# EAGLE board harp load cells interface v1.1 (EAGLE 6.5.0)
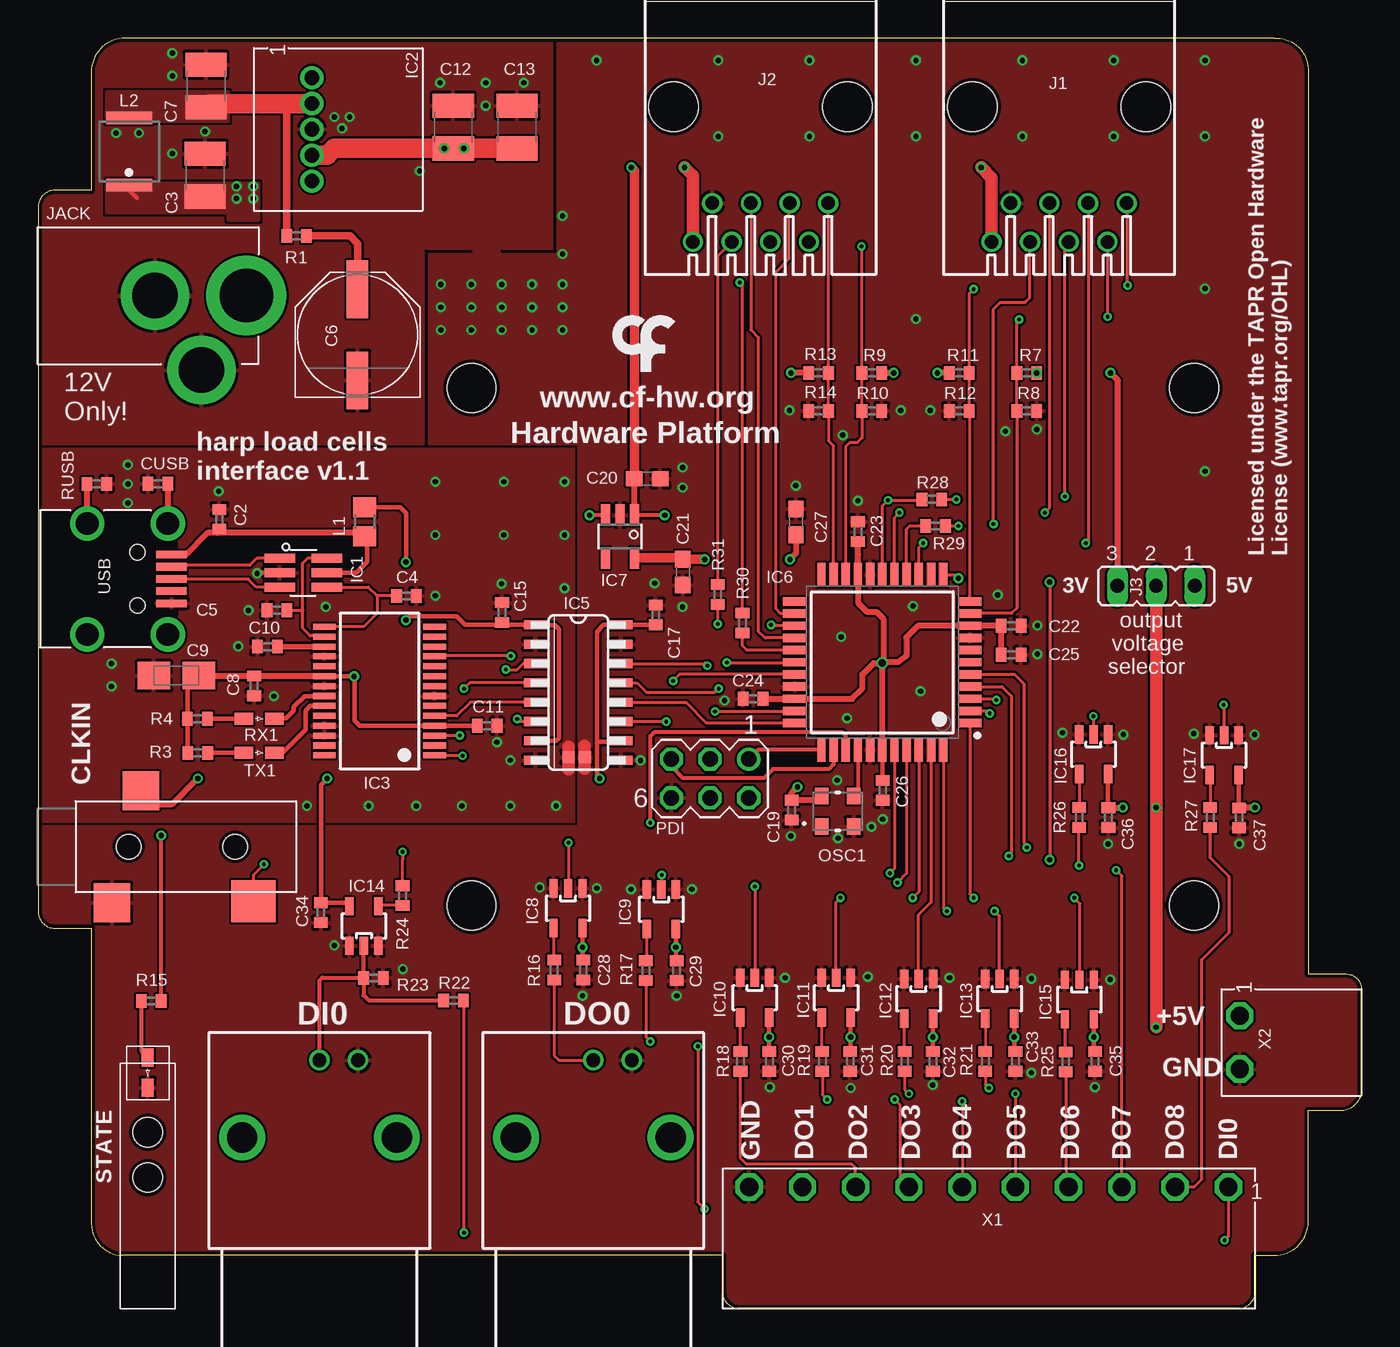
[diagram p0: board, top side]
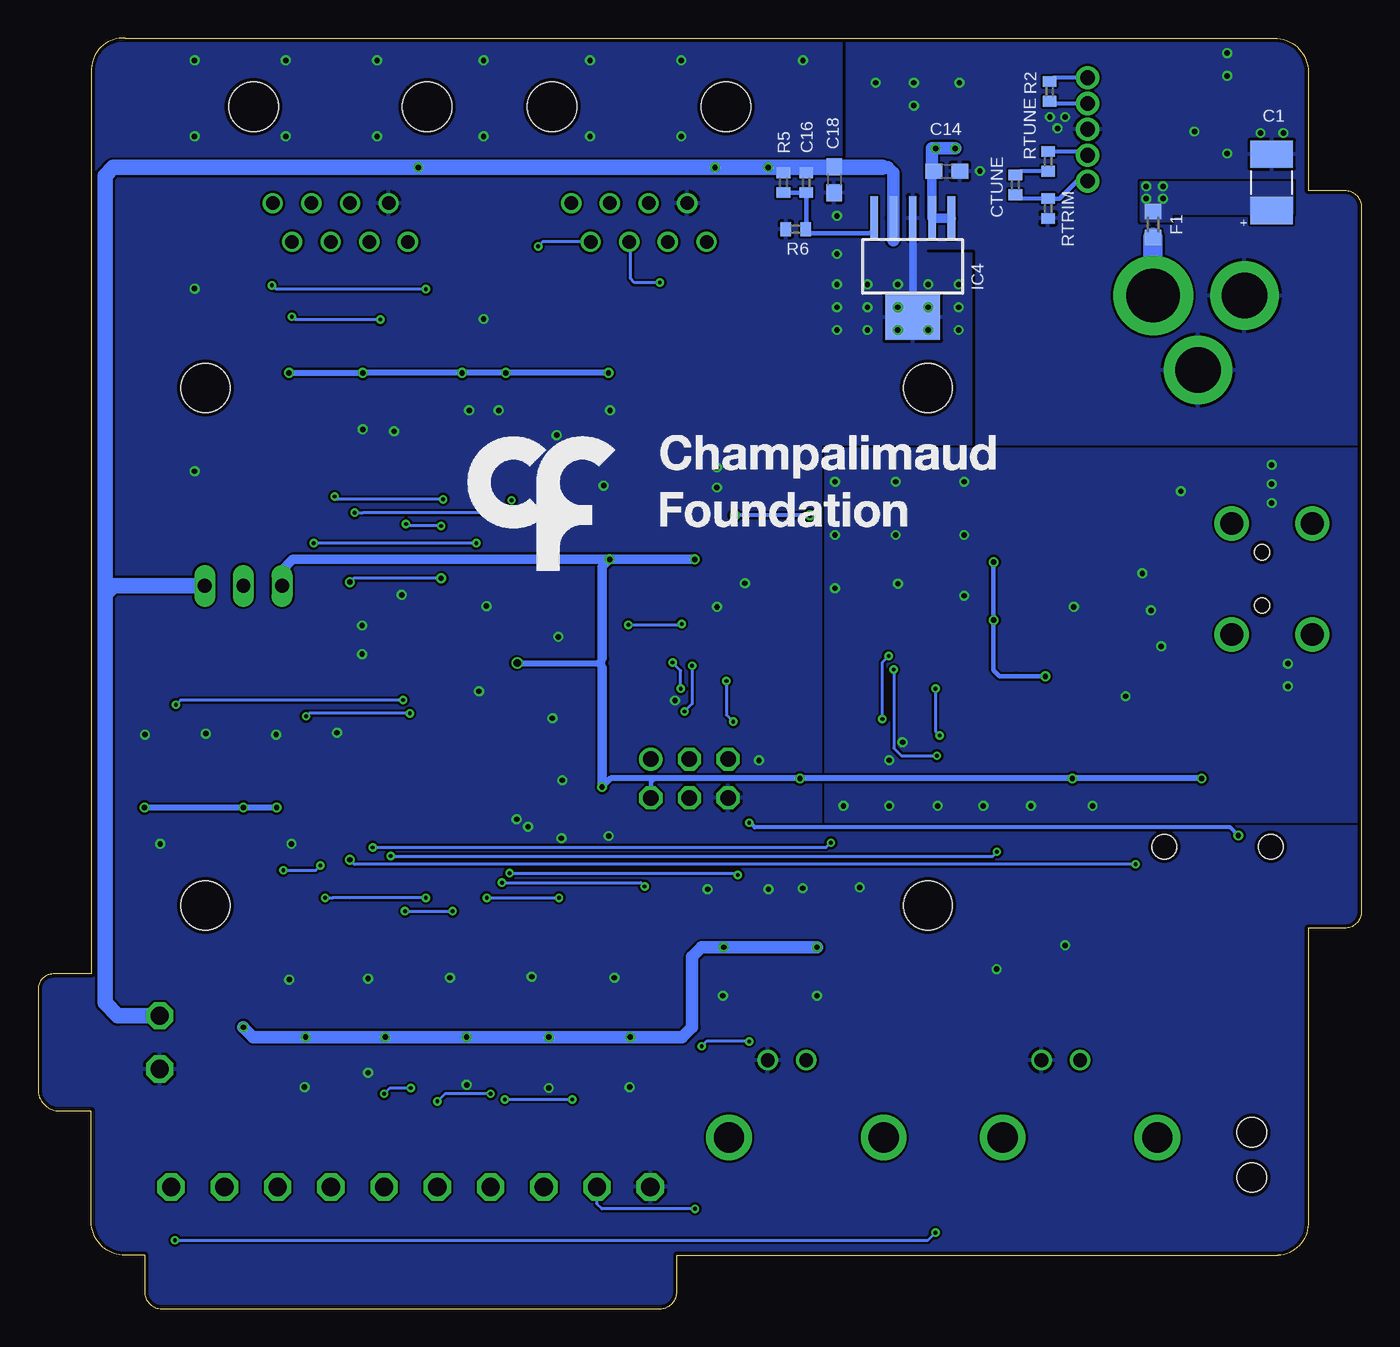
[diagram p1: board, bottom side, seen from below]

Size 87 x 83.5 mm. Coordinates in mm from the lower left corner, seen from the top.
Outline: 3.5,81.26 3.5,73.5 1.12,73.5 arc90 0,72.38 0,26.12 arc90 1.12,25 3.5,25 3.5,5.74 arc90 5.5,3.5 45,3.5 45,1.12 arc90 46.12,0 78.88,0 arc90 80,1.12 80,3.5 81.26,3.5 arc90 83.5,5.74 83.5,13 85.59,13 arc90 87,14.41 87,21 arc90 86,22 83.5,22 83.5,81.5 arc90 81.26,83.5 5.74,83.5 arc90 3.5,81.26
Copper layers (1*16): Top 0.018mm / dielectric 1.55mm / Bottom 0.018mm
Design rules "eC_2Layer_PClass6_BaseCopperO18_eCDefault *": minimum track width 0.15mm, minimum drill 0.15mm, track to track 0.15mm, track to pad 0.15mm, pad to pad 0.15mm, via to via 0.15mm, smd to smd 0mil, copper to edge 0.25mm, drill to drill 0.35mm, minimum pad ring 0.125mm, minimum via ring 0.125mm, stop-mask expansion 0mil, vias tented up to drill 0.45mm, thermal gap 0.2mm
Holes 3.2 mm at 28.5,60.5 28.5,26.5 76,60.5 76,26.5
tRestrict: 4 lines
bRestrict: 3 lines

## Footprints (pad centres in the part's own frame; a part is rotated, then mirrored left to right if it is on the bottom)
CAP_100UF_HAND = smd 1.8 x 2.8: + -1.85,0; - 1.85,0
C0402 = smd 0.7 x 0.9: 1 -0.65,0; 2 0.65,0
C1210 = smd 1.6 x 2.7: 1 -1.4,0; 2 1.4,0
PANASONIC_E = smd 3.8 x 1.4: + 3,0; - -3,0
A/3216-18W = smd 2.15 x 1.8: + 1.475,0; - -1.475,0
C0603 = smd 1.1 x 1: 1 -0.85,0; 2 0.85,0
35RASMT2BHNTRX = smd 2.4 x 2.55: 1 0.8,3.675; 5 -1.1,-3.675 | smd 2.9 x 2.75: 4 8.2,-3.575 | hole 1.6: 0,0; 7,0
R0603 = smd 1 x 1.1: 1 -0.85,0; 2 0.85,0
SOT23-6L = smd 0.6 x 2: P$1 -0.95,-1.55; P$2 0,-1.55; P$3 0.95,-1.55; P$4 0.95,1.55; P$5 0,1.55; P$6 -0.95,1.55
SIP-5 = drill 0.97 pad 1.52: P1 -3.4,0; P2 -1.7,0; P3 0,0; P4 1.7,0; P5 3.4,0
SSOP28 = smd 0.4 x 1.5: 1 -4.225,-3.625; 2 -3.575,-3.625; 3 -2.925,-3.625; 4 -2.275,-3.625; 5 -1.625,-3.625; 6 -0.975,-3.625; 7 -0.325,-3.625; 8 0.325,-3.625; 9 0.975,-3.625; 10 1.625,-3.625; 11 2.275,-3.625; 12 2.925,-3.625; 13 3.575,-3.625; 14 4.225,-3.625; 15 4.225,3.625; 16 3.575,3.625; 17 2.925,3.625; 18 2.275,3.625; 19 1.625,3.625; 20 0.975,3.625; 21 0.325,3.625; 22 -0.325,3.625; 23 -0.975,3.625; 24 -1.625,3.625; 25 -2.275,3.625; 26 -2.925,3.625; 27 -3.575,3.625; 28 -4.225,3.625
SOT223-6 = smd 0.508 x 2.87: P$1 -2.54,-3.175; P$2 -1.27,-3.175; P$3 0,-3.175; P$4 1.27,-3.175; P$5 2.54,-3.175 | smd 3.6 x 2.962: P$6 0,3.353
NSOIC-16 = smd 0.6 x 1.55: 1 -4.437,-2.789; 2 -3.167,-2.789; 3 -1.897,-2.789; 4 -0.627,-2.789; 5 0.643,-2.789; 6 1.913,-2.789; 7 3.183,-2.789; 8 4.453,-2.789; 9 4.453,2.811; 10 3.183,2.811; 11 1.913,2.811; 12 0.643,2.811; 13 -0.627,2.811; 14 -1.897,2.811; 15 -3.167,2.811; 16 -4.437,2.811
QFP80P1200X1200X120-44N = smd 1.55 x 0.55: 1 -5.75,4; 2 -5.75,3.2; 3 -5.75,2.4; 4 -5.75,1.6; 5 -5.75,0.8; 6 -5.75,0; 7 -5.75,-0.8; 8 -5.75,-1.6; 9 -5.75,-2.4; 10 -5.75,-3.2; 11 -5.75,-4; 23 5.75,-4; 24 5.75,-3.2; 25 5.75,-2.4; 26 5.75,-1.6; 27 5.75,-0.8; 28 5.75,0; 29 5.75,0.8; 30 5.75,1.6; 31 5.75,2.4; 32 5.75,3.2; 33 5.75,4 | smd 0.55 x 1.55: 12 -4,-5.75; 13 -3.2,-5.75; 14 -2.4,-5.75; 15 -1.6,-5.75; 16 -0.8,-5.75; 17 0,-5.75; 18 0.8,-5.75; 19 1.6,-5.75; 20 2.4,-5.75; 21 3.2,-5.75; 22 4,-5.75; 34 4,5.75; 35 3.2,5.75; 36 2.4,5.75; 37 1.6,5.75; 38 0.8,5.75; 39 0,5.75; 40 -0.8,5.75; 41 -1.6,5.75; 42 -2.4,5.75; 43 -3.2,5.75; 44 -4,5.75
TSOT23-5 = smd 0.6 x 1.408: 1 -0.95,-1.404; 2 0,-1.404; 3 0.95,-1.404; 4 0.95,1.404; 5 -0.95,1.404
SOT23-5 = smd 0.55 x 1.2: 1 -0.95,-1.3; 2 0,-1.3; 3 0.95,-1.3; 4 0.95,1.3; 5 -0.95,1.3
BNC_RA = drill 0.9 pad 1.27: 1 0,-5.08; 2 -2.54,-5.08 | drill 2: P$1 -5.08,0; P$2 5.08,0
520426-4 = drill 0.889: 1 -4.445,6.35; 2 -3.175,8.89; 3 -1.905,6.35; 4 -0.635,8.89; 5 0.635,6.35; 6 1.905,8.89; 7 3.175,6.35; 8 4.445,8.89 | hole 3.251: -5.715,0; 5.715,0
JP2 = drill 0.914 long: 1 -2.54,0; 2 0,0; 3 2.54,0
DC_POWER_INPUT_2.1MM = drill 3.5: P1 8.5,0 | drill 3: P2 2.5,0; P3 5.55,-4.9
R0805 = smd 1.3 x 1.5: 1 -0.95,0; 2 0.95,0
IND_LPS4012 = smd 0.81 x 3.04: 1 -2.2,0; 2 2.2,0
OSCILLATOR_3.2X2.5 = smd 0.9 x 1.1: P$1 -1.05,-1; P$2 1.05,-1; P$3 1.05,1; P$4 -1.05,1
MA03-2 = drill 1.016: 1 -2.54,-1.27 | drill 1.016 octagon: 2 -2.54,1.27; 3 0,-1.27; 4 0,1.27; 5 2.54,-1.27; 6 2.54,1.27
R0402 = smd 0.7 x 0.9: 1 -0.65,0; 2 0.65,0
LED_HAND = smd 1.2 x 0.8: A -1,0; K 1,0
TP08SQ = smd 0.8 x 0.8: TP 0,0
LED_PIPE_7513D2-L = hole 1.93: -1.486,0; 1.486,0
240-0002-1 = smd 0.5 x 2: P$1 -1.6,8.65; P$2 -0.8,8.65; P$3 0,8.65; P$4 0.8,8.65; P$5 1.6,8.65 | drill 1.5: SHIELD_1 -3.65,3.1; SHIELD_2 3.65,3.1; SHIELD_3 3.65,8.4; SHIELD_4 -3.65,8.4 | hole 1: -1.75,6.4; 1.75,6.4
CON_3.5MM_1X10 = drill 1.2 octagon: P1 -15.75,0; P2 -12.25,0; P3 -8.75,0; P4 -5.25,0; P5 -1.75,0; P6 1.75,0; P7 5.25,0; P8 8.75,0; P9 12.25,0; P10 15.75,0
CON_3.5MM_1X2 = drill 1.2 octagon: P1 -1.75,0; P2 1.75,0

## Placement (x,y rotation side)
C1  22uF  [CAP_100UF_HAND]  5.9,74.02 90 bottom
C2  100nF  [C0402]  11.92,51.88 90 top
C3  22uF  [C1210]  11,74.5 90 top
C4  47pF  [C0402]  24.22,46.84 0 top
C5  47pF  [C0402]  15.71,45.9 180 top
C6  100uF  [PANASONIC_E]  21,64 90 top
C7  22uF  [C1210]  11.05,80.35 90 top
C8  100nF  [C0402]  14.21,40.93 270 top
C9  4.7uF  [A/3216-18W]  9.09,41.61 0 top
C10  100nF  [C0402]  15.08,43.51 180 top
C11  100nF  [C0402]  29.53,38.3 0 top
C12  47uF  [C1210]  27.3,77.65 90 top
C13  47uF  [C1210]  31.5,77.65 90 top
C14  10uF  [C0603]  27.25,74.75 0 bottom
C15  100nF  [C0402]  30.5,45.75 90 top
C16  13pF  [C0402]  36.5,74 270 bottom
C17  100nF  [C0402]  40.61,45.59 90 top
C18  10uF  [C0603]  34.66,74.19 270 bottom
C19  100nF  [C0402]  49.54,32.76 270 top
C20  10uF  [C0603]  40.05,54.54 0 top
C21  10uF  [C0603]  42.39,48.41 270 top
C22  100nF  [C0402]  63.97,44.88 0 top
C23  100nF  [C0402]  53.9,51.07 90 top
C24  100nF  [C0402]  47.01,40.08 180 top
C25  330nF  [C0402]  63.97,42.97 0 top
C26  330nF  [C0402]  55.53,34.06 270 top
C27  10uF  [C0603]  49.82,51.7 90 top
C28  100nF  [C0402]  35.85,22.26 270 top
C29  100nF  [C0402]  41.98,22.21 270 top
C30  100nF  [C0402]  48.08,16.25 270 top
C31  100nF  [C0402]  53.39,16.25 270 top
C32  100nF  [C0402]  58.83,16.25 270 top
C33  100nF  [C0402]  64.25,16.25 270 top
C34  100nF  [C0402]  18.6,26.03 270 top
C35  100nF  [C0402]  69.48,16.25 270 top
C36  100nF  [C0402]  70.36,32.27 270 top
C37  100nF  [C0402]  78.95,32.25 270 top
CLKIN  [35RASMT2BHNTRX]  5.96,30.36 0 top
CTUNE  NA  [C0402]  22.75,73.85 270 bottom
CUSB  4.7nF  [C0402]  7.88,54.22 180 top
F1  1A FB  [R0603]  13.7,71.25 270 bottom
IC1  USBLC6-2SC6  [SOT23-6L]  17.44,48.36 270 top
IC2  DC-DC-SIP-5  [SIP-5]  18,77.5 270 top
IC3  FT232RL  [SSOP28]  22.45,40.59 90 top
IC4  TPS78630DCQ  [SOT223-6]  29.5,68.5 180 bottom
IC5  SI8642BC-B-IS1  [NSOIC-16]  35.5,40.5 270 top
IC6  ATXMEGA128A4U-AU  [QFP80P1200X1200X120-44N]  55.5,42.48 180 top
IC7  LP5907MFX-3.3  [TSOT23-5]  38.27,50.74 180 top
IC8  SN74LVC1G125  [SOT23-5]  34.84,26.32 180 top
IC9  SN74LVC1G125  [SOT23-5]  40.98,26.25 180 top
IC10  SN74LVC1G125  [SOT23-5]  47.11,20.44 180 top
IC11  SN74LVC1G125  [SOT23-5]  52.46,20.44 180 top
IC12  SN74LVC1G125  [SOT23-5]  57.88,20.38 180 top
IC13  SN74LVC1G125  [SOT23-5]  63.22,20.38 180 top
IC14  SN74LVC1G125  [SOT23-5]  21.42,25.15 0 top
IC15  SN74LVC1G125  [SOT23-5]  68.45,20.32 180 top
IC16  SN74LVC1G125  [SOT23-5]  69.38,36.44 180 top
IC17  SN74LVC1G125  [SOT23-5]  77.97,36.38 180 top
IN0  BNC  [BNC_RA]  18.5,11.25 180 top
J1  Port 0  [520426-4]  67.12,79 180 top
J2  Port 0  [520426-4]  47.5,79 180 top
J3  [JP2]  73.5,47.5 180 top
JACK  DC_JACK2.1MM  [DC_POWER_INPUT_2.1MM]  5.19,66.58 0 top
L1  ???  [R0805]  21.48,51.72 270 top
L2  1.5u  [IND_LPS4012]  6,76.05 90 top
OSC1  [OSCILLATOR_3.2X2.5]  52.57,32.69 0 top
OUT0  BNC  [BNC_RA]  36.5,11.25 180 top
PDI  [MA03-2]  44.18,34.84 180 top
R1  0  [R0402]  17,70.5 180 top
R2  NA  [R0402]  20.5,80 270 bottom
R3  2050 NA  [R0402]  10.5,36.53 180 top
R4  680 NA  [R0402]  10.48,38.77 180 top
R5  95.3k  [R0402]  38,74 90 bottom
R6  30.9k  [R0402]  37.19,70.94 0 bottom
R7  NA  [R0402]  65,61.5 0 top
R8  100k  [R0402]  65,59 180 top
R9  NA  [R0402]  54.81,61.5 0 top
R10  100k  [R0402]  54.81,59 180 top
R11  NA  [R0402]  60.56,61.5 180 top
R12  100k  [R0402]  60.56,59 0 top
R13  NA  [R0402]  51.31,61.5 180 top
R14  100k  [R0402]  51.31,59 0 top
R15  68  [R0402]  7.44,20.22 0 top
R16  33  [R0402]  33.93,22.26 270 top
R17  33  [R0402]  39.96,22.21 270 top
R18  33  [R0402]  46.18,16.25 270 top
R19  33  [R0402]  51.56,16.25 270 top
R20  33  [R0402]  56.97,16.25 270 top
R21  33  [R0402]  62.27,16.25 270 top
R22  330  [R0402]  27.31,20.25 180 top
R23  100k  [R0402]  22.05,21.73 180 top
R24  33  [R0402]  23.97,27.15 90 top
R25  33  [R0402]  67.56,16.22 270 top
R26  33  [R0402]  68.44,32.28 270 top
R27  33  [R0402]  77.06,32.28 270 top
R28  33  [R0402]  58.75,53.19 0 top
R29  33  [R0402]  59,51.44 0 top
R30  33  [R0402]  46.31,45.06 270 top
R31  33  [R0402]  44.69,46.94 270 top
RTRIM  243  [R0402]  20.6,72.3 90 bottom
RTUNE  NA  [R0402]  20.6,75.4 90 bottom
RUSB  1M  [R0402]  3.87,54.2 0 top
RX1  GREEN NA  [LED_HAND]  14.53,38.77 0 top
STATE  GREEN  [LED_HAND]  7.21,15.51 270 top
TP1  TPTP08SQ  [TP08SQ]  34.88,36.25 0 top
TP2  TPTP08SQ  [TP08SQ]  35.94,36.25 0 top
TX1  RED NA  [LED_HAND]  14.53,36.53 0 top
U$1  [LED_PIPE_7513D2-L]  7.21,10.11 90 top
U$2  [LOGO_5]  55.68,54.22 0 bottom
U$4  [LOGO_7]  39,64 0 top
USB  [240-0002-1]  0.13,47.96 270 top
X1  CON_3.5MM_1X10  [CON_3.5MM_1X10]  62.5,8 180 top
X2  CON_3.5MM_1X2  [CON_3.5MM_1X2]  79,17.5 270 top

## Library data of the parts
C1 JACK L2 OSC1 RX1 STATE TX1 U$1 U$2 U$4 = CNP-miscellaneous
C2-C37 CTUNE CUSB F1 L1 R1-R31 RTRIM RTUNE RUSB = rcl
CLKIN IC2 IN0 OUT0 USB X1 X2 = CNP-connectors
IC1 = CNP 2
IC3 = ftdichip; MPN: FT232RL; OC_FARNELL: 1146032; OC_NEWARK: 91K9918
IC4 IC7 = CNP
IC5 = CNP-ics 2
IC6 = xmega-a4
IC8-IC17 = My_library 0v2
J1 J2 = con-amp
J3 = jumper
PDI = con-lstb; OC_FARNELL: unknown; OC_NEWARK: unknown
TP1 TP2 = testpad

## Nets
3V3OUT: C10.1 IC3.17
!CS0_0: IC6.14 J1.3
!CS0_1: IC6.10 J1.2 R7.1 R8.2
!CS0_2: IC6.11 J1.1 R11.1 R12.2
!CS1_0: IC6.24 J2.3
!CS1_1: IC6.20 J2.2 R9.1 R10.2
!CS1_2: IC6.21 J2.1 R13.1 R14.2
+5V: C16.1 C18.1 C20.1 IC4.P$4 IC7.1 IC7.3 J1.8 J2.8 J3.1 R5.2 X2.P1
+12V: C1.+ C3.1 F1.1 L2.1
+V: C28.1 C29.1 C30.1 C31.1 C32.1 C33.1 C35.1 C36.1 C37.1 IC8.5 IC9.5 IC10.5 IC11.5 IC12.5 IC13.5 IC15.5 IC16.5 IC17.5 J3.2
BNC_DI0: IC14.2 IN0.1 R22.2 R23.2
CLK_SYNC: CLKIN.4 IC6.12
CTS: IC5.11 IC6.29
DCIN: C7.1 IC2.P2 L2.2 R1.2 R2.2
DI0: R22.1 X1.P1
DO0: OUT0.1 R16.2
DO1: R17.2 X1.P9
DO2: R18.2 X1.P8
DO3: R19.2 X1.P7
DO4: R20.2 X1.P6
DO5: R21.2 X1.P5
DO6: R25.2 X1.P4
DO7: R26.2 X1.P3
DO8: R27.2 X1.P2
FT_CTS: IC3.11 IC5.6
FT_RTS: IC3.3 IC5.4
FT_RXD: IC3.5 IC5.5
FT_TXD: IC3.1 IC5.3
GND: C1.- C3.2 C6.- C7.2 C12.2 C13.2 C14.2 C17.2 C18.2 C19.2 C20.2 C21.2 C22.2 C23.2 C24.2 C25.2 C26.2 C27.2 C28.2 C29.2 C30.2 C31.2 C32.2 C33.2 C34.2 C35.2 C36.2 C37.2 CLKIN.5 IC2.P3 IC4.P$3 IC4.P$6 IC5.9 IC5.15 IC6.8 IC6.18 IC6.30 IC6.38 IC7.2 IC8.1 IC8.3 IC9.1 IC9.3 IC10.1 IC10.3 IC11.1 IC11.3 IC12.1 IC12.3 IC13.1 IC13.3 IC14.1 IC14.3 IC15.1 IC15.3 IC16.1 IC16.3 IC17.1 IC17.3 IN0.2 J1.7 J2.7 JACK.P2 JACK.P3 OSC1.P$2 OUT0.2 PDI.6 R6.1 R8.1 R10.1 R12.1 R14.1 R23.1 RTRIM.1 STATE.K TP2.TP X1.P10 X2.P2
GND2: C2.2 C4.2 C5.2 C8.2 C9.- C10.2 C11.2 C15.2 CUSB.2 IC1.P$2 IC3.7 IC3.18 IC3.21 IC3.25 IC3.26 IC5.2 IC5.8 RUSB.2 TP1.TP USB.P$5
IN00: IC6.4 R24.2
MISO0: IC6.16 J1.5
MISO1: IC6.26 J2.5
MOSI0: IC6.15 R29.1
MOSI0_T: J1.6 R29.2
MOSI1: IC6.25 R31.2
MOSI1_T: J2.6 R31.1
N$1: IC16.4 R26.1
N$2: IC15.4 R25.1
N$4: IC10.4 R18.1
N$5: R4.1 RX1.A
N$6: IC17.4 R27.1
N$7: IC3.22 RX1.K
N$8: IC9.4 R17.1
N$9: IC12.4 R20.1
N$11: IC8.4 R16.1
N$12: CTUNE.2 IC2.P5 RTRIM.2
N$13: IC1.P$3 USB.P$3
N$14: CTUNE.1 RTUNE.1
N$15: CUSB.1 USB.SHIELD_4
N$16: IC2.P1 R2.1
N$17: IC13.4 R21.1
N$18: F1.2 JACK.P1
N$19: IC11.4 R19.1
N$20: C16.2 IC4.P$5 R5.1 R6.2
N$21: IC14.4 R24.1
N$23: R15.1 STATE.A
N$24: C6.+ R1.1
N$60: C2.1 IC1.P$5 L1.2 USB.P$1
N$401: R3.1 TX1.A
N$591: IC3.23 TX1.K
N$601: RUSB.1 USB.SHIELD_1
N$701: IC1.P$1 USB.P$2
OSC1: IC6.37 OSC1.P$3
OUT00: IC6.5 IC8.2
OUT01: IC6.40 IC9.2
OUT02: IC6.41 IC10.2
OUT03: IC6.42 IC11.2
OUT04: IC6.43 IC12.2
OUT05: IC6.44 IC13.2
OUT06: IC6.1 IC15.2
OUT07: IC6.2 IC16.2
OUT08: IC6.3 IC17.2
P5.45V: C12.1 C13.1 C14.1 IC2.P4 IC4.P$1 IC4.P$2 RTUNE.2
PDI-CLK: IC6.35 PDI.5
PDI-DATA: IC6.34 PDI.1
RTS: IC5.13 IC6.28
RXD: IC5.12 IC6.33
SCK0: IC6.17 R28.1
SCK0_T: J1.4 R28.2
SCK1: IC6.27 R30.2
SCK1_T: J2.4 R30.1
STATE: IC6.36 R15.2
TXD: IC5.14 IC6.32
USB5V: C8.1 C9.+ C11.1 C15.1 IC3.4 IC3.20 IC5.1 IC5.7 L1.1 R3.2 R4.2
USBDM: C5.1 IC1.P$6 IC3.16
USBDP: C4.1 IC1.P$4 IC3.15
VCCIO: C17.1 C19.1 C21.1 C22.1 C23.1 C24.1 C25.1 C26.1 C27.1 C34.1 CLKIN.1 IC5.10 IC5.16 IC6.9 IC6.19 IC6.31 IC6.39 IC7.5 IC14.5 J3.3 OSC1.P$4 PDI.2 R7.2 R9.2 R11.2 R13.2

## Tracks (layer width: path | path; a pad name or v marks a point on that pad's centre or on a via)
3V3OUT
  Top 0.305: 16.04,43.51 C10.1
  Top 0.356: IC3.17 16.04,43.51
!CS0_0  (via drill 0.25 pad 0.55)
  Top 0.203: IC6.14 57.9,50.03 v58.19,50.31 | J1.3 69.03,50.47 v68.88,50.31
  Bottom 0.203: v58.19,50.31 v68.88,50.31
!CS0_1  (via drill 0.25 pad 0.55)
  Top 0.203: IC6.10 64,45.69 64.35,46.04 R8.2 R7.1 64.35,64.85 v64.5,65 | v70.31,65.19 70.31,70.1 J1.2
  Bottom 0.203: v64.5,65 70.12,65 v70.31,65.19
!CS0_2  (via drill 0.25 pad 0.55)
  Top 0.203: IC6.11 61.25,58.84 R12.2 R11.1 61.21,66.71 v61.5,67 | v71.62,67.25 71.62,72.59 J1.1
  Bottom 0.203: v61.5,67 71.38,67 v71.62,67.25
!CS1_0
  Top 0.203: IC6.24 48.82,45.68 48.5,46 48.5,68.12 49.38,69 49.38,72.62 J2.3
!CS1_1  (via drill 0.25 pad 0.55)
  Top 0.203: IC6.20 53.1,56.66 53.38,56.94 53.88,56.94 54.16,57.23 R10.2 R9.1 54.12,61.54 v54.12,69.81
  Bottom 0.203: J2.2 53.83,70.11 v54.12,69.81
!CS1_2
  Top 0.203: IC6.21 52.3,56.7 52,57 52,58.96 R14.2 R13.1 51.96,72.63 J2.1
+5V  (via drill 0.35 pad 0.65)
  Top 0.254: IC7.3 v36.27,52.15 v36.26,52.14 | v41.2,52.14 IC7.1
  Top 0.305: IC7.1
  Top 0.406: IC7.1 39.22,54.53 C20.1 39.21,54.55
  Top 0.508: 39.2,52.16 IC7.1
  Top 0.61: 39.21,54.55 39.21,74.79 v39,75
  Top 0.813: J2.8 43.05,74.44 v42.5,75 | J1.8 62.68,74.32 v62,75
  Bottom 0.254: C16.1 R5.2 | v36.26,52.14 v41.2,52.14
  Bottom 0.305: C18.1 33.54,75.04 33.5,75 | C16.1 36.65,74.65 37,75
  Bottom 0.813: 30.77,70.23 IC4.P$4 30.77,74.64 31.12,75 31.5,75
  Bottom 1.016: X2.P1 81.75,19.25 82.6,20.1 82.6,47 | 82.6,47 82.6,74.46 82.06,75 v62,75 v42.5,75 v39,75 37,75 33.5,75 31.5,75 | J3.1 82,47.5 82.6,47
+12V  (via drill 0.35 pad 0.65)
  Top 0.254: L2.1 6,73.5 6.5,73
  Bottom 0.254: C1.+ 5.9,72.1 6,72
  other vias: 14.15,73.75 13.05,73.75 14.15,72.95 13.05,72.95
  pour Top (no thermals): 4.5,74 14.5,74 14.5,71.5 12.5,71.5 12.5,72 4.5,72
  pour Bottom (no thermals): 4.5,74 14.5,74 14.5,71.5 12.5,71.5 12.5,72 4.5,72
+V  (via drill 0.35 pad 0.65)
  Top 0.305: 48.11,19.45 IC10.5 v48.06,17.85 48.06,16.92 C30.1 | 58.83,19.36 IC12.5 | 41.93,25.23 IC9.5 41.93,23.68 | 35.79,25.19 IC8.5 v35.79,23.75 35.79,22.96 C28.1 | C35.1 69.4,16.98 IC15.5 v69.4,17.85 | IC13.5 v64.17,17.85 64.17,16.87 C33.1 | IC12.5 C32.1 | C31.1 53.41,16.93 IC11.5 v53.41,17.85 | IC12.5 v58.83,17.85 | C29.1 41.93,22.92 41.93,23.68 | 41.93,23.68 42,23.75 v41.93,23.75 | IC16.5 70.33,32.95 C36.1 | IC17.5 78.92,32.94 C37.1
  Top 0.406: C36.1 70.98,32.92 v71.31,32.94 | 73.48,33.42 73.5,33.44 | v80,32.94 78.99,32.94 C37.1
  Top 0.813: v73.5,18.5 v73.5,32.94 | 73.5,33.44 v73.5,32.94 | v73.5,32.94 J3.2
  Bottom 0.254: v73.5,32.94 73.5,33 73.47,32.97 73.47,32.94
  Bottom 0.406: v71.31,32.94 73.47,32.94 | v73.5,32.94 v80,32.94
  Bottom 0.813: v35.79,23.75 v41.93,23.75 43.38,23.75 44,23.12 44,18.5 44.65,17.85 v48.06,17.85 v53.41,17.85 v58.83,17.85 v64.17,17.85 v69.4,17.85 72.85,17.85 v73.5,18.5
BNC_DI0
  Top 0.254: IN0.1 18.5,21.56 18.69,21.75 21.39,21.75 R23.2 | R23.2 21.4,23.83 IC14.2 | R22.2 21.75,20.25 21.4,20.6 R23.2
CLK_SYNC  (via drill 0.25 pad 0.55, 0.35 pad 0.65)
  Top 0.203: CLKIN.4 14.16,28.52 v14.85,29.2 | IC6.12 60.27,48.23 v60.5,48 | v66.5,47.75 v66.5,29.5
  Bottom 0.203: v14.85,29.2 66.2,29.2 v66.5,29.5 | v60.5,48 66.25,48 v66.5,47.75
CTS  (via drill 0.25 pad 0.55)
  Top 0.203: IC6.29 42.18,41.68 v41.75,41.25 | v41.3,38.58 38.32,38.58
  Top 0.254: 38.32,38.58 IC5.11
  Bottom 0.203: v41.75,41.25 41.75,39.03 v41.3,38.58
DCIN
  Top 0.305: 16.35,79.05 16.5,79.2
  Top 0.508: R1.2 16.35,79.05
  Top 1.27: IC2.P2 16.5,79.2 11.3,79.2 C7.1
  Bottom 0.254: IC2.P2 20.35,79.2 R2.2
  pour Top (no thermals): 12.5,80 12.5,78 4.5,78 4.5,80
DI0  (via drill 0.25 pad 0.55)
  Top 0.203: X1.P1 78.25,4.75 v78,4.5 | v28,5 28,20.21 R22.1
  Bottom 0.203: v78,4.5 28.5,4.5 v28,5
DO0
  Top 0.203: R16.2 33.93,16.63 34.25,16.31 36.48,16.31 OUT0.1
DO1  (via drill 0.25 pad 0.55)
  Top 0.203: R17.2 39.96,17.85 v40.25,17.56 | v43.38,17.25 43.38,7 v43.81,6.56
  Bottom 0.203: v40.25,17.56 43.06,17.56 v43.38,17.25 | v43.81,6.56 49.94,6.56 50.25,6.88 X1.P9
DO2
  Top 0.203: X1.P8 53.75,9.25 53.5,9.5 46.56,9.5 46.19,9.88 R18.2
DO3  (via drill 0.25 pad 0.55)
  Top 0.203: R19.2 51.56,14.07 v51.88,13.75 | X1.P7 56.88,8 56.69,8.19 56.69,13.38 v56.31,13.75
  Bottom 0.203: v56.31,13.75 v51.88,13.75
DO4  (via drill 0.25 pad 0.55)
  Top 0.203: R20.2 56.97,14.4 v57.25,14.12 | v60.75,13.62 X1.P6
  Bottom 0.203: v57.25,14.12 60.25,14.12 v60.75,13.62
DO5  (via drill 0.25 pad 0.55)
  Top 0.203: R21.2 62.27,14.73 v62.5,14.5 | v64.25,14.12 X1.P5
  Bottom 0.203: v62.5,14.5 63.88,14.5 v64.25,14.12
DO6
  Top 0.203: R25.2 67.56,9.19 X1.P4
DO7  (via drill 0.25 pad 0.55)
  Top 0.203: X1.P3 71.25,28.44 v70.88,28.81 | v68.44,29.12 R26.2
  Bottom 0.203: v70.88,28.81 68.75,28.81 v68.44,29.12
DO8
  Top 0.203: R27.2 77.06,29.62 78.31,28.38 78.31,24.75 76.5,22.94 76.5,8.5 76,8 X1.P2
FT_CTS  (via drill 0.25 pad 0.55)
  Top 0.203: IC5.6 31.66,38.59 v31.5,38.75 | v31.08,42.9 26.11,42.9
  Top 0.254: 26.11,42.9 IC3.11
  Top 0.305: 26.09,42.88 IC3.11
  Bottom 0.203: v31.5,38.75 31.5,42.48 v31.08,42.9
FT_RTS  (via drill 0.25 pad 0.55)
  Top 0.203: IC5.4 28.38,41.13 v28,40.75 | v27.73,37.66 IC3.3
  Top 0.254: IC3.3
  Top 0.305: IC3.3
  Bottom 0.203: v28,40.75 28,37.93 v27.73,37.66
FT_RXD
  Top 0.203: IC5.5 28.43,39.86 27.53,38.96 IC3.5
  Top 0.254: IC3.5
  Top 0.305: 26.12,38.93 IC3.5
  Top 0.406: 26.09,38.96 IC3.5
FT_TXD  (via drill 0.25 pad 0.55)
  Top 0.203: v27.91,36.34 26.1,36.34 | v30.75,42 31.5,42 32,42.5 32.61,42.5 IC5.3
  Top 0.254: 26.1,36.34 IC3.1
  Bottom 0.203: v30.75,42 30.75,36.85 30.25,36.34 v27.91,36.34
GND  (via drill 0.35 pad 0.65)
  Top 0.406: IC6.8
  Top 0.813: 35.94,37 35.94,35.5
  Bottom 0.508: 29.5,72 29.5,65.5
  other vias: 5.13,77.26 6.63,77.26 10.98,77.36 8.83,82.51 8.83,81.01 28.48,65.81 30.48,65.81 30.48,64.31 28.48,64.31 32.48,65.81 32.48,64.31 32.48,67.31 30.48,67.31 28.48,67.31 26.48,67.31 26.48,65.81 26.48,64.31 19.48,78.31 20.48,78.31 19.98,77.56 8.83,75.91 25.08,74.76 29.43,79.06 29.43,80.56 26.43,80.56 40.53,47.67 42.36,46.12 58.01,40.58 52.8,44.15 57.52,46.17 53.18,38.8 65.69,44.89 53.9,53.1 49.81,54.09 49.48,31.07 45.13,39.97 54.78,31.67 39.61,36.04 55.53,32.17 52.53,34.73 52.6,30.92 35.8,20.57 41.98,20.57 48.11,14.57 53.42,14.5 58.82,14.71 65.3,15.5 69.48,14.57 42.98,27.57 38.98,27.57 36.73,27.63 32.98,27.69 49.11,21.75 54.55,21.82 59.92,21.75 65.3,21.69 70.48,21.63 70.35,30.54 78.97,30.54 79.97,37.73 71.35,37.73 67.35,37.86 75.97,37.79 23.98,22.32 19.48,23.88 52.9,57.41 49.4,59.04 56.71,59.04 58.65,59.04 65.65,57.79 63.59,57.66 63.09,46.91 34.48,67.31 34.48,69.31 34.48,71.81 34.48,65.81 34.48,64.31 31.93,80.56 65.69,43.02 42.37,55.28 42.37,53.96 44.71,82.04 44.71,77.04 50.71,77.04 50.71,82.04 36.71,82.04 57.71,82.04 57.71,77.04 64.71,77.04 64.71,82.04 70.71,82.04 70.71,77.04 76.71,77.04 76.71,82.04 76.71,67.04 76.71,55.04 57.71,65.04
  pour Bottom (rank 2): 45.11,-0.06 83.5,-0.06 83.5,13 87,13 87,22 83.5,22 83.5,83.5 3.5,83.5 3.5,73.5 0,73.5 0,25 3.5,25 3.5,3.5 45.11,3.5
  pour Top (rank 2): 83.5,-0.06 83.5,13 87,13 87,22 83.5,22 83.5,83.5 3.5,83.5 3.5,73.5 0,73.5 0,25 3.5,25 3.5,3.5 45.11,3.5 45.11,-0.06
GND2  (via drill 0.35 pad 0.65)
  Top 0.305: IC1.P$2 14.44,48.36 v14.4,48.32
  Top 0.813: 34.88,36.94 34.88,35.44
  other vias: 5.9,55.45 5.9,54.2 5.9,52.95 11.87,53.72 13.84,45.89 4.84,42.39 4.84,40.89 13.17,43.52 15.5,40.25 26.12,46.85 18.91,46.12 30.16,37.23 26.12,50.85 26.12,54.35 30.62,54.35 34.62,54.35 34.62,50.85 30.62,50.85 30.47,47.65 34.62,47.35 31.05,36.04 31.05,33.04 34.05,33.04 24.86,33.04 27.86,33.04 17.68,33.04 21.74,33.04
  pour Top: 0,56.5 35.25,56.5 35.25,32 0,32
  pour Bottom: 0,56.5 35.25,56.5 35.25,32 0,32
IN00  (via drill 0.25 pad 0.55)
  Top 0.203: IC6.4 63.37,40.88 64,40.25 64,29.94 v63.81,29.75 | R24.2 23.97,29.5 v23.97,30.03
  Bottom 0.203: v63.81,29.75 24.25,29.75 v23.97,30.03
MISO0  (via drill 0.25 pad 0.55)
  Top 0.203: IC6.16 56.3,51.99 v56.62,52.31 | J1.5 66.49,52.62 v66.19,52.31
  Bottom 0.203: v56.62,52.31 65,52.31 65.62,52.31 v66.19,52.31
MISO1
  Top 0.203: IC6.26 47.79,44.08 47.38,44.5 47.38,63.81 46.87,64.32 J2.5
MOSI0
  Top 0.203: IC6.15 57.1,51.23 57.31,51.44 R29.1
MOSI0_T  (via drill 0.25 pad 0.55)
  Top 0.203: J1.6 65.19,70.08 65.19,66.44 64.88,66.12 63.25,66.12 62.81,65.69 v62.81,51.56 | R29.2 v60.5,51.44
  Bottom 0.203: v60.5,51.44 62.69,51.44 v62.81,51.56
MOSI1  (via drill 0.25 pad 0.55)
  Top 0.203: IC6.25 48.24,44.88 v48.19,44.94 | v44.69,45 R31.2
  Bottom 0.203: v48.19,44.94 44.75,44.94 v44.69,45
MOSI1_T
  Top 0.203: R31.1 44.69,69.2 J2.6
N$1
  Top 0.203: IC16.4 68.44,35.14 R26.1
  Top 0.305: 68.43,33.11 R26.1
N$2
  Top 0.203: IC15.4 67.5,16.93
  Top 0.305: IC15.4 | 67.5,16.93 R25.1
N$4
  Top 0.203: IC10.4 46.16,17.23 R18.1
N$5
  Top 0.305: RX1.A R4.1
N$6
  Top 0.203: IC17.4 77.06,35.08 R27.1
N$7
  Top 0.305: IC3.22 17.52,40.26 16.82,39.56 16.82,39.31 16.31,38.8 15.55,38.8 RX1.K
N$8
  Top 0.203: 40.01,24.97 40.01,22.92 R17.1
  Top 0.305: 40.01,24.97 IC9.4
N$9
  Top 0.203: IC12.4 56.93,17.14
  Top 0.305: 56.93,17.14 R20.1
N$11
  Top 0.203: IC8.4 33.89,22.99 R16.1
N$12
  Bottom 0.254: RTRIM.2 22.5,72.95 CTUNE.2
  Bottom 0.305: IC2.P5 18.7,74.1 19.85,72.95 RTRIM.2
N$13
  Top 0.203: IC1.P$3 14.35,47.41 13.82,47.94 8.8,47.94
  Top 0.305: 8.81,47.93 USB.P$3 8.8,47.94
N$14
  Bottom 0.254: RTUNE.1 22.38,74.75 CTUNE.1
N$15
  Top 0.305: 8.51,51.63 USB.SHIELD_4
  Top 0.406: CUSB.1 8.51,51.63
N$16
  Bottom 0.254: IC2.P1 20.25,80.9 R2.1
N$17
  Top 0.203: IC13.4 62.27,17.02
  Top 0.305: 62.27,17.02 R21.1
N$18
  Bottom 1.27: F1.2 JACK.P1
N$19
  Top 0.203: IC11.4 51.51,16.72
  Top 0.305: 51.51,16.72 R19.1
N$20
  Bottom 0.305: R5.1 C16.2 36.5,70.97 R6.2 36.27,70.67 32.33,70.67 32,71 32,71.64 IC4.P$5
N$21
  Top 0.203: R24.1 22.42,26.5 IC14.4
N$23
  Top 0.254: R15.1 6.79,16.93 STATE.A
N$24
  Top 0.508: R1.1 20.5,70.5 21,70 C6.+
N$60
  Top 0.305: IC1.P$5 20.92,48.36 21.64,49.09 21.64,50.36 21.01,50.99 21.49,50.99 L1.2 | 9.66,49.49 8.83,49.51 USB.P$1 | C2.1 11.92,51.12
  Top 0.406: 21.01,50.99 11.79,50.99 | 11.79,50.99 11.16,50.99 9.66,49.49 | 11.92,51.12 11.79,50.99
N$401
  Top 0.305: TX1.A R3.1
N$591
  Top 0.305: IC3.23 17.89,39.61 17.58,39.31 17.58,38.04 16.05,36.51 15.54,36.51 TX1.K
N$601
  Top 0.305: 3.22,51.62 USB.SHIELD_1
  Top 0.406: RUSB.1 3.22,51.62
N$701
  Top 0.203: IC1.P$1 14.39,49.31 13.92,48.84 8.87,48.84
  Top 0.305: 8.81,48.78 USB.P$2 8.87,48.84
OSC1
  Top 0.152: 53.9,33.96 OSC1.P$3
  Top 0.254: IC6.37 53.9,33.96
OUT00  (via drill 0.25 pad 0.55)
  Top 0.203: IC6.5 64.19,41.68 64.81,41.06 64.81,30.62 v65,30.31 | v34.88,30.62 34.88,27.65 IC8.2
  Bottom 0.203: v65,30.31 35.19,30.31 v34.88,30.62
OUT01  (via drill 0.25 pad 0.55)
  Top 0.203: IC6.40 56.3,28.93 v56,28.62 | v41,28.5 41,27.57 IC9.2
  Bottom 0.203: v56,28.62 41.12,28.62 v41,28.5
OUT02  (via drill 0.25 pad 0.55)
  Top 0.203: IC6.41 57.1,28.6 v56.5,28 | v47.12,27.75 47.12,21.76 IC10.2
  Bottom 0.203: v56.5,28 47.38,28 v47.12,27.75
OUT03  (via drill 0.25 pad 0.55)
  Top 0.203: IC6.42 57.9,27.4 v57.5,27 | IC11.2 52.46,26.71 v52.75,27
  Bottom 0.203: v57.5,27 v52.75,27
OUT04
  Top 0.203: IC6.43 58.7,26.7 57.88,25.88 IC12.2
OUT05  (via drill 0.25 pad 0.55)
  Top 0.203: IC6.44 59.5,26.37 v59.75,26.12 | 63.2,21.72 63.2,25.8 v62.88,26.12
  Top 0.305: 63.2,21.72 IC13.2
  Bottom 0.203: v62.88,26.12 v59.75,26.12
OUT06  (via drill 0.25 pad 0.55)
  Top 0.203: IC6.1 61.25,27.25 v61.5,27 | IC15.2 68.5,21.66 68.5,26.62 v68.12,27
  Top 0.305: 68.47,21.63 IC15.2
  Bottom 0.203: v61.5,27 66.5,27 67.62,27 v68.12,27
OUT07  (via drill 0.25 pad 0.55)
  Top 0.203: IC6.2 62.41,39.28 v62.56,39.12 | v69.38,38.94 IC16.2
  Bottom 0.203: v62.56,39.12 69.19,39.12 v69.38,38.94
OUT08  (via drill 0.25 pad 0.55)
  Top 0.203: IC6.3 62.92,40.08 v63,40 | v77.94,39.69 77.94,37.72 IC17.2
  Bottom 0.203: v63,40 77.62,40 v77.94,39.69
P5.45V  (via drill 0.35 pad 0.65)
  Top 0.813: C12.1 v26.7,76.25
  Top 1.27: C13.1 v26.7,76.25 v28,76.25 C12.1 19.45,76.25 19,75.8 IC2.P4
  Bottom 0.254: RTUNE.2 18.25,76.05 IC2.P4
  Bottom 0.61: C14.1 28.23,74.88 IC4.P$2 IC4.P$1
  Bottom 0.813: v26.7,76.25 28.25,76.25 | 28.23,74.88 28.23,76.02 v28,76.25
PDI-CLK
  Top 0.254: IC6.35 52.3,35.77 51.99,35.45 48.31,35.45 47.72,34.87 42.41,34.87 41.63,35.65 PDI.5
PDI-DATA
  Top 0.254: IC6.34 47.33,36.73 PDI.1
RTS  (via drill 0.25 pad 0.55)
  Top 0.203: IC5.13 39.37,41.13 40,40.5 44.5,40.5 v44.75,40.75 | v45.28,42.46 49.73,42.46
  Top 0.254: 49.73,42.46 IC6.28
  Bottom 0.203: v44.75,40.75 44.75,41.93 v45.28,42.46
RXD
  Top 0.203: IC6.33 43.96,38.48 42.62,39.82 38.35,39.82
  Top 0.254: 38.35,39.82 IC5.12
SCK0  (via drill 0.25 pad 0.55)
  Top 0.203: IC6.17 55.5,52.75 v55.88,53.12 58.04,53.12 R28.1
SCK0_T  (via drill 0.25 pad 0.55)
  Top 0.203: v67.5,53.38 67.5,69.85 J1.4 | R28.2 v60.38,53.19
  Bottom 0.203: v60.38,53.19 67.31,53.19 v67.5,53.38
SCK1
  Top 0.203: IC6.27 46.59,43.28 46.31,43.56 R30.2
SCK1_T  (via drill 0.25 pad 0.55)
  Top 0.203: R30.1 46.31,67.25 v46.12,67.44
  Bottom 0.203: v46.12,67.44 47.81,67.44 48.06,67.69 48.06,70.04 J2.4
STATE  (via drill 0.25 pad 0.55, 0.35 pad 0.65)
  Top 0.254: R15.2 v8.09,31.09 | 53.1,37.15 IC6.36 53.06,36.77 53.06,37.69 52.88,37.88 40.5,37.88 40.25,37.62 v40.25,31.94
  Bottom 0.254: v8.09,31.09 8.62,31.62 39.88,31.62 40.25,32 v40.25,31.94
TXD  (via drill 0.25 pad 0.55)
  Top 0.203: IC5.14 43.85,42.4 | v44.5,39.25 49.72,39.25
  Top 0.254: 43.85,42.4 v44,42.25 | 49.72,39.25 IC6.32
  Bottom 0.203: v44,42.25 44,39.75 v44.5,39.25
USB5V  (via drill 0.35 pad 0.65)
  Top 0.305: 16.31,41.56 C8.1 | IC3.20 v20.78,41.55 20.8,41.53 20.8,38.65 21.14,38.31 IC3.4 28.87,38.31 | R3.2 9.83,36.55 R4.2 9.84,38.79 9.84,41.45 9.7,41.59 10.56,41.59 C9.+ | v24.18,49.06 24.18,52.29 23.8,52.67 L1.1 | IC5.7 34.07,37.32 34.25,37.5 34.25,44.66 33.98,44.93 32.72,44.93 IC5.1 30.75,44.94 | 30.75,44.94 28.06,44.94 27.5,45.5 24.43,45.5 v24.18,45.25 | C15.1 30.75,44.94
  Top 0.406: IC3.20 16.31,41.56 10.61,41.56 C9.+ | 28.87,38.31 C11.1
  Top 0.813: 21.46,52.69 L1.1
  Bottom 0.305: v24.18,49.06 v24.18,45.25 24.18,41.96 23.81,41.57 22.7,41.57 v20.78,41.55
USBDM
  Top 0.203: IC1.P$6 17.71,49.31 17.4,49 17.4,45.9 | 18.77,44.22 17.88,44.22 17.4,44.7 17.4,45.9 | C5.1 17.4,45.9
  Top 0.305: 18.77,44.22 IC3.16
USBDP
  Top 0.203: IC1.P$4 21.72,47.41 22.28,46.85 22.28,46.83 | 22.28,46.83 22.28,45.7 21.4,44.82 IC3.15 | C4.1 22.29,46.84 22.28,46.83
  Top 0.305: IC3.15
VCCIO  (via drill 0.35 pad 0.65, 0.5 pad 0.65)
  Top 0.203: IC6.39
  Top 0.305: 42.31,49.34 C21.1 | 36.75,37.25 36.75,44.5 37.19,44.94 IC5.16 40.6,44.94 C17.1 | 36.75,37.25 36.75,35.01 v36.91,34.84 | 36.75,37.25 38.24,37.25 IC5.10 | IC6.39 | IC6.39 55.5,34.73 C26.1 | IC14.5 20.24,26.68 C34.1 18.6,34.44 v19,34.84
  Top 0.406: IC6.9 C22.1 C25.1 | IC6.9 | C23.1 53.9,49.55 IC6.19 53.9,46.38 54.49,45.79 55.1,45.79 55.56,45.33 55.56,42.59 55.41,42.43 | C24.1 IC6.31 53.51,40.08 54.19,40.76 54.19,41.67 54.95,42.43 55.41,42.43 | 55.41,42.43 55.5,42.49 | 55.5,42.49 v55.5,42.43 IC6.39 | IC6.9 57.85,44.87 57.08,44.11 57.08,42.89 56.53,42.49 55.5,42.49 | OSC1.P$4 51.52,33.41 C19.1 49.54,33.9 v49.92,34.28 | CLKIN.1 6.76,33.17 8.83,33.17 v10.51,34.84 | C27.1 49.82,49.64 v49.42,49.24 | R13.2 v49.5,61.5 | R9.2 v56.25,61.5 | R11.2 v59.12,61.5 | v70.5,61.5 71,61 71,47.54 J3.3 | R7.2 65.71,61.66 65.69,61.5 65.5,61.65 R7.2
  Top 0.61: IC7.5 42.31,49.34 | v43.83,49.24 42.4,49.24 C21.1
  Bottom 0.305: PDI.2 46.72,34.63 46.5,34.84
  Bottom 0.406: v55.5,42.43 50.23,42.43 | 50.23,42.43 49.92,42.13 49.92,42.74 50.23,42.43 | v10.51,34.84 v19,34.84 v36.91,34.84 46.5,34.84 49.36,34.84 v49.92,34.28 | v49.5,61.5 v56.25,61.5 v59.12,61.5 R7.2 v70.5,61.5
  Bottom 0.61: 49.92,42.13 v49.92,34.28 | v43.83,49.24 v49.42,49.24 | v49.42,49.24 70.25,49.24 71,48.5 71,47.54 J3.3 | 49.92,42.74 49.92,48.75 v49.42,49.24
  other vias: 65.65,61.5

## Text on the board
tPlace: www.cf-hw.org | 12V / Only! | Hardware Platform | harp load cells / interface v1.1 | Licensed under the TAPR Open Hardware / License (www.tapr.org/OHL) | 3V | 5V | output | voltage | selector | DI0 | DO0 | +5V | GND | GND | DO1 | DO2 | DO3 | DO4 | DO5 | DO6 | DO7 | DO8 | DI0 | Licensed under the TAPR Open / Hardware License (www.tapr.org/OHL) / / Copyright 2018 Artur Silva and Filipe Carvalho